# Altium PCB AFE_mezzanine.PcbDoc (part 2 of 2)
Units mm, origin at the board's own origin, x right, y up, seen from the top; angles counter-clockwise.
Board outline 100.05 x 34.55 mm, 4 copper layers (Component Side, Ground Plane, Power Plane, Solder Side), stack 1.013 mm thick; 133 components, 101 nets, 466 pads, 426 vias.
Unrouted connection lines stored in the file: 1.
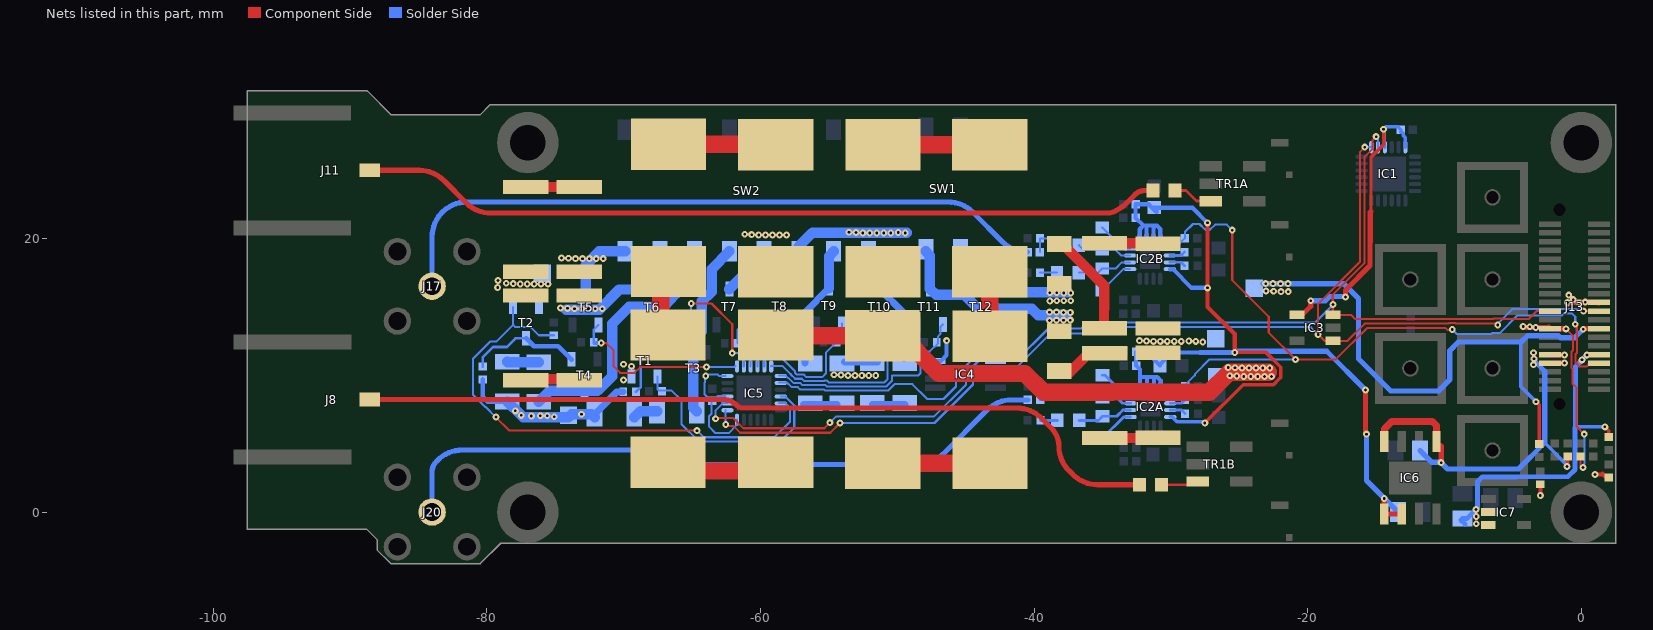
[diagram p4: the nets of this part, all layers, seen from the top]

## Via types
v1: diameter 0.5, hole 0.2, Component Side to Solder Side, tented both sides, 307 vias
v2: diameter 0.6, hole 0.3, Component Side to Solder Side, tented both sides, 114 vias
v3: diameter 0.5, hole 0.2, Component Side to Solder Side, 5 vias

## Nets (pads, with @x,y where several pads share a name; then routed paths per layer and width w, separated by ;. In a path a pad name is that pad's centre, name@x,y a point inside that pad or via, vN(x,y) a via of type N, cw(c..) or ccw(c..) an arc to the next point about the centre after c; other vN are vias at no path point) (continued)
N6V0A: C26.2 IC7.2 IC7.3 J13.31 R7.2 R36.1 R38.1 R46.2 R47.2 TP4.1 | length 36
  Component Side w0.254: v1(1.713,6.228) 2,5.941 R7.2@2,5.47
  Solder Side w0.254: -0.421,6.228 v1(1.713,6.228)
  Solder Side w0.356: R47.2@-80.304,9.695 -80.304,8.438 -79.946,8.08 R38.1@-78.501,8.08 ; C26.2@-8.819,-0.581 C26.2@-8.5,-0.9 ; C26.2@-8.701,-0.463 -8.357,-0.463 v1(-7.711,0.183) -7.584,0.31 -7.584,2.231 -7.244,2.57 -4.8,2.57 -4.79,2.58 -0.988,2.58 -0.468,3.1 -0.468,6.181 -0.421,6.228 -0.421,10.64 0.051,11.112 v1(0.051,11.125) ; v1@0.076,11.151 v1(0.406,11.481)
  Solder Side w0.508: R36.1@-72.127,7.142 -70.476,8.793 R46.2@-70.03,8.793
  Solder Side w0.762: R38.1@-78.501,8.08 v1(-77.487,7.066) -77.334,6.914 -74.03,6.914 -73.802,7.142 v1(-73.09,7.142) -72.356,7.142 R36.1@-72.127,6.914
  other v1: -7.685,-0.859 -7.685,-0.325 -75.072,6.965 -76.748,7.015 -76.088,7.041 -75.58,7.041 -77.916,7.396
N12V0A: J13.25 R8.2 R24.1 R26.1 TP2.1 | length 44.1
  Component Side w0.254: v1(-3.317,8.057) -3.088,7.828 R8.2@-3.088,4.971
  Component Side w0.381: v1(0.138,13.365) 0.185,13.413 J13.25@1.3,13.413
  Solder Side w0.254: -4.434,12.426 -4.434,9.174 v1(-3.317,8.057)
  Solder Side w0.381: v1@-23.281,16.693 v1(-23.078,16.693) v1(-22.544,16.693) v1(-21.986,16.693) v1(-21.452,16.693) -17.378,16.693 -16.296,15.61 -16.296,11.206 -13.934,8.844 -10.454,8.844 -9.616,9.682 -9.616,11.816 -9.006,12.426 -4.434,12.426 -4.409,12.426 -3.943,12.892 -1.674,12.892 -1.518,12.735 -0.492,12.735 v1(0.138,13.365)
  Solder Side w0.508: R26.1@-53.875,10.954 R24.1@-51.462,10.954
  other v1: -53.609,9.987 -53.101,9.987 -52.593,9.987 -52.085,9.987 -51.577,9.987 -54.117,10.013 -54.625,10.038 -21.96,16.109 -21.427,16.109 -22.494,16.134 -23.052,16.159
NetC5A_1: C5A.1 R10A.1 R13A.2 | length 2.4
  Solder Side w0.203: C5A.1@-39.55,8.2 -39.53,8.22 R13A.2@-39.53,9.2 -38.8,9.2 R10A.1@-38.3,8.7
NetC5B_1: C5B.1 R10B.1 R13B.2 | length 2.4
  Solder Side w0.152: C5B.1@-39.58,19 -39.56,19.02 R13B.2@-39.56,20 -38.83,20 R10B.1@-38.33,19.5
NetC13A_2: C13A.2 TR1A.1 | length 2.9
  Component Side w0.203: C13A.2@-29.7,23.5 -28.894,23.5 -28.124,22.73 TR1A.1@-27.09,22.73
NetC13B_2: C13B.2 TR1B.1 | length 2.8
  Component Side w0.203: C13B.2@-30.7,2 -28.27,2 TR1B.1@-28.04,2.23
NetIC2A_1: IC2A.1 R15A.2 | length 2.7
  Solder Side w0.203: R15A.2@-35,5.4 -33.45,6.95 IC2A.1@-32.95,6.95
NetIC2A_2: IC2A.2 R12A.2 R15A.1 | length 4.1
  Solder Side w0.203: R12A.2@-36.7,6.7 -35.3,6.7 R15A.1@-35,7 -33.964,7 -33.514,7.45 IC2A.2@-32.95,7.45
NetIC2A_3: IC2A.3 R9A.1 R10A.2 | length 4.1
  Solder Side w0.203: R10A.2@-36.7,8.7 -35.3,8.7 R9A.1@-35,8.4 -33.987,8.4 -33.537,7.95 IC2A.3@-32.95,7.95
NetIC2A_4: IC2A.4 R9A.2 | length 2.7
  Solder Side w0.203: R9A.2@-35,10 -34.825,10 -33.275,8.45 IC2A.4@-32.95,8.45
NetIC2A_10: IC2A.10 R11A.2 | length 1.2
  Solder Side w0.203: IC2A.10@-30.05,7.95 -29.22,7.95 R11A.2@-28.97,8.2
NetIC2A_11: IC2A.11 R14A.2 | length 1.2
  Solder Side w0.203: IC2A.11@-30.05,7.45 -29.22,7.45 R14A.2@-28.97,7.2
NetIC2B_1: IC2B.1 R15B.2 | length 2.7
  Solder Side w0.152: R15B.2@-35.03,16.2 -33.48,17.75 IC2B.1@-32.98,17.75
NetIC2B_2: IC2B.2 R12B.2 R15B.1 | length 4.1
  Solder Side w0.152: R12B.2@-36.73,17.5 -35.33,17.5 R15B.1@-35.03,17.8 -34.036,17.8 -33.586,18.25 IC2B.2@-32.98,18.25
NetIC2B_3: IC2B.3 R9B.1 R10B.2 | length 4.1
  Solder Side w0.152: R10B.2@-36.73,19.5 -36.43,19.2 R9B.1@-35.03,19.2 -34.094,19.2 -33.644,18.75 IC2B.3@-32.98,18.75
NetIC2B_4: IC2B.4 R9B.2 | length 2.7
  Solder Side w0.152: R9B.2@-35.03,20.8 -33.48,19.25 IC2B.4@-32.98,19.25
NetIC2B_10: IC2B.10 R11B.2 | length 1.2
  Solder Side w0.203: IC2B.10@-30.08,18.75 -29.25,18.75 R11B.2@-29,19
NetIC2B_11: IC2B.11 R14B.2 | length 1.2
  Solder Side w0.203: IC2B.11@-30.08,18.25 -29.25,18.25 R14B.2@-29,18
NetR12A_1: R12A.1 R16A.2 | length 1.2
  Solder Side w0.203: R16A.2@-39.53,6.7 R12A.1@-38.3,6.7
NetR12B_1: R12B.1 R16B.2 | length 1.2
  Solder Side w0.152: R16B.2@-39.56,17.5 R12B.1@-38.33,17.5
NetR18_2: R18.2 R19.1 | length 3.9
  Component Side w0.762: R19.1@-34.863,19.64 -30.977,19.64 R18.2@-30.952,19.615
NetR19_2: R19.2 R20.1 | length 7.7
  Component Side w0.762: R20.1@-38.165,19.591 -37.914,19.591 -34.863,16.54 -34.863,14.854 -34.893,14.824 -34.893,13.47 R19.2@-34.863,13.44
NetR20_2: R20.2 SW1.1 T12.3 | length 9.8
  Solder Side w0.762: SW1.1@-45.379,19.05 -43.855,17.526 T12.3@-43.855,16.291 -43.622,16.058 v1@-37.556,16.058
  other v1: -38.851,15.423 -38.343,15.448 -37.835,15.448 -37.327,15.448 -37.835,16.007 -37.327,16.007 -38.851,16.032 -38.343,16.032
NetR21_2: R21.2 R22.1 | length 3.9
  Component Side w0.762: R22.1@-34.838,5.413 -30.977,5.413 R21.2@-30.952,5.438
NetR22_2: R22.2 R23.1 | length 3.9
  Component Side w0.762: R23.1@-38.14,10.112 -37.507,10.112 -36.006,11.613 R22.2@-34.838,11.613
NetR23_2: R23.2 SW1.2 T11.3 | length 13.8
  Solder Side w0.762: SW1.2@-47.919,19.05 -47.614,18.745 T11.3@-47.614,16.316 -47.167,15.87 -45.089,15.87 -44.084,14.864 -40.172,14.864 -39.689,14.381 -37.632,14.381 ; v1@-38.242,14.407 -38.038,14.407
  other v1: -38.877,14 -38.369,14.026 -37.861,14.026 -37.353,14.026 -37.861,14.585 -37.353,14.585 -38.877,14.61 -38.369,14.61
NetR24_2: R24.2 R25.1 | length 2.4
  Solder Side w0.508: R24.2@-51.831,7.851 R25.1@-49.443,7.851
NetR25_2: R25.2 SW2.1 T10.3 | length 8.9
  Solder Side w0.508: T10.3@-51.297,16.316 -49.494,14.513 R25.2@-49.494,11.234
  Solder Side w0.762: SW2.1@-52.11,19.05 -51.297,18.237 T10.3@-51.297,16.316
NetR26_2: R26.2 R27.1 | length 2.4
  Solder Side w0.508: R27.1@-56.847,7.852 R26.2@-54.409,7.852
NetR27_2: R27.2 SW2.2 T9.3 | length 9
  Solder Side w0.508: R27.2@-56.758,10.904 -56.758,14.593 T9.3@-54.991,16.36
  Solder Side w0.762: T9.3@-54.991,16.36 -54.991,18.709 SW2.2@-54.65,19.05
NetR28_2: R28.2 R29.1 | length 7.9
  Component Side w1.27: R28.2@-51.069,3.574 -43.235,3.574 R29.1@-43.22,3.559
NetR29_2: R29.2 R30.1 | length 4.7
  Component Side w1.27: R30.1@-43.245,17.555 -43.245,12.885 R29.2@-43.22,12.859
NetR30_2: R30.2 R31.1 | length 7.8
  Component Side w1.27: R31.1@-51.043,26.855 R30.2@-43.245,26.855
NetR31_2: R31.2 SW2.3 T8.3 | length 11.9
  Solder Side w0.762: T8.3@-58.587,16.342 -57.19,17.739 SW2.3@-57.19,19.05 -57.19,19.411 -56.199,20.401 v1(-52.516,20.401) v1(-52.008,20.401) v1(-51.5,20.401) v1(-50.992,20.401) v1(-50.484,20.401) v1(-49.418,20.401) v1@-49.316,20.401
  other v1: -53.024,20.427 -49.926,20.427 -53.532,20.452
NetR32_2: R32.2 R33.1 | length 8.4
  Component Side w1.27: R33.1@-66.766,3.634 -66.129,2.997 -59.53,2.997 R32.2@-58.892,3.635
NetR33_2: R33.2 R34.1 | length 5.2
  Component Side w1.27: R33.2@-66.766,12.934 -66.715,12.984 -66.715,13.972 -67.299,14.556 -67.299,16.996 R34.1@-66.715,17.58
NetR34_2: R34.2 R35.1 | length 7.8
  Component Side w1.27: R34.2@-66.715,26.88 -58.917,26.88 R35.1@-58.892,26.855
NetR35_2: R35.2 SW2.4 T7.3 | length 3.8
  Solder Side w0.762: T7.3@-62.27,16.291 -59.885,18.676 ccw(c-60.259,19.05) SW2.4@-59.73,19.05
  other v1: -60.136,20.249 -59.628,20.249 -59.12,20.249 -58.612,20.249 -58.104,20.249 -60.644,20.274 -61.152,20.3
NetR36_2: R36.2 R37.1 | length 1.9
  Solder Side w0.762: R36.2@-69.227,6.914 -68.77,7.371 R37.1@-67.555,7.371
NetR37_2: R37.2 SW2.5 T3.3 | length 12.9
  Solder Side w0.762: R37.2@-64.655,7.371 -64.912,7.627 T3.3@-64.912,9.371 -64.912,12.578 -64.281,13.209 -64.281,15.393 -63.565,16.109 -63.565,17.755 SW2.5@-62.27,19.05
NetR38_2: R38.2 R39.1 | length 2.3
  Solder Side w0.762: R38.2@-78.501,10.98 -78.475,10.955 R39.1@-76.215,10.955
NetR39_2: R39.2 SW2.6 T4.3 | length 19.3
  Solder Side w0.762: R39.2@-76.215,8.055 -75.414,8.856 T4.3@-72.872,8.856 -71.912,8.856 -70.83,9.938 -70.83,13.772 -69.585,15.016 -67.071,15.016 -66.508,15.579 -66.508,15.62 -65.973,16.155 -65.932,16.155 -64.81,17.277 SW2.6@-64.81,19.05
NetR40_2: R40.2 R41.1 | length 4
  Component Side w0.762: R40.2@-77.104,9.708 -73.295,9.708 R41.1@-73.192,9.605
NetR41_2: R41.2 SW2.7 T6.3 | length 9.9
  Solder Side w0.762: v1@-74.211,14.786 -72.582,14.786 -71.797,14.786 -70.317,16.266 T6.3@-67.909,16.266 -67.35,16.824 SW2.7@-67.35,19.05
  other v1: -73.598,14.864 -73.09,14.864 -72.582,14.864 -72.074,14.864 -71.566,14.864 -74.106,14.889 -74.614,14.915
NetR42_2: R42.2 R43.1 | length 3.9
  Component Side w0.762: R42.2@-77.154,23.755 R43.1@-73.243,23.755
NetR43_2: R43.2 SW2.8 T5.3 | length 5.1
  Solder Side w0.762: T5.3@-72.786,16.286 -72.786,18.039 -71.775,19.05 SW2.8@-69.89,19.05
  other v1: -73.522,18.522 -73.014,18.522 -72.506,18.522 -71.998,18.522 -71.49,18.522 -74.03,18.547 -74.538,18.572
NetR46_1: R46.1 T1.3 T3.1 | length 6.5
  Solder Side w0.203: R46.1@-69.09,8.793 -68.747,9.136 -68.747,11.925 T1.3@-68.468,12.204
  Solder Side w0.508: T1.3@-68.468,12.204 -67.934,11.671 T3.1@-65.862,11.671
NetR47_1: R47.1 T2.3 T4.1 | length 8.4
  Solder Side w0.203: R47.1@-80.304,10.635 -80.304,11.308 -79.542,12.07 -78.526,12.07 -77.898,12.698 T2.3@-77.129,12.698
  Solder Side w0.356: T2.3@-77.129,12.698 -76.552,12.121 -74.787,12.121 T4.1@-73.822,11.156
P3V3: C10.2 C12.2 IC1.21 IC1.24 IC3.4 IC4.8 IC5.18 IC5.21 IC5.24 J13.19 R5.1 R6.1 R40.1 R42.1 T1.2 T2.2 TP5.1 | length 38.7
  Component Side w0.254: -15.378,21.967 -15.378,25.945 -14.463,26.859 v1(-14.463,27.974)
  Component Side w0.305: v1(-3,1.212) R6.1@-3,2.03 ; v1(1.001,2.748) 1.484,2.748 1.535,2.799 1.804,2.53 R5.1@2,2.53
  Component Side w0.381: IC3.4@-20.771,14.417 -20.401,14.417 -19.776,15.042 v1(-19.776,15.448) ; v3(-17.247,15.723) -17.247,16.206 -15.443,18.01 -15.443,19.739 -15.426,19.756 -15.426,21.918 -15.378,21.967 ; v1(-1.016,15.316) -1.016,15.166 -0.84,15.342 v1(0.279,15.342) 1.215,15.342 1.27,15.287 J13.19@1.3,15.318 ; v1@-0.688,15.644 -0.34,15.296 v1(-0.167,15.296)
  Solder Side w0.152: C12.2@-63.489,8.115 -63.137,8.467 IC5.21@-62.544,8.467 ; IC5.24@-62.544,9.967 -62.574,9.936 -63.016,9.936 -63.139,10.059 -63.874,10.059 v1(-63.997,9.936) -64.023,9.936 -64.048,9.911 -64.048,9.505 -64.079,9.474 -64.079,8.592 -63.607,8.121 C12.2@-63.54,8.121 -63.581,8.08 -63.581,7.194 -63.754,7.021 -63.754,6.239 -63.286,5.771 -62.33,5.771 -61.722,6.378 IC5.18@-61.722,6.755
  Solder Side w0.254: IC1.21@-14.362,26.669 -14.416,26.724 -14.416,27.273 -14.463,27.319 v1(-14.463,27.974) -14.289,28.148 -13.419,28.148 C10.2@-13.215,27.945 ; C10.2@-13.215,27.767 -13.096,27.767 -13.006,27.678 -13.006,27.519 -12.862,27.374 IC1.24@-12.862,26.669
  Solder Side w0.305: IC4.8@-47.223,11.038 -46.817,11.038 -46.395,11.46 v1(-46.395,12.527)
  Solder Side w0.381: v1(-19.776,15.448) -18.709,15.448 -18.396,15.762 -17.286,15.762 v3(-17.247,15.723)
  other v1: -70.004,9.647 -69.433,10.648 -70.017,10.8 -0.599,15.524 -0.929,15.855 -79.212,16.413 -77.561,16.667 -77.053,16.667 -76.545,16.667 -76.037,16.667 -75.529,16.667 -78.069,16.693 -78.577,16.718 -79.186,16.921
P5V0A: C1A.2 C1B.2 C2A.2 C2B.2 C3A.2 C3B.2 C25.2 IC2A.5 IC2A.6 IC2A.7 IC2A.8 IC2A.12 IC2B.5 IC2B.6 IC2B.7 IC2B.8 IC2B.12 IC6.1 IC6.2 | length 78.3
  Component Side w0.254: v1(-27.523,6.507) -24.729,9.301 -22.507,9.301 -22.117,9.692 -22.117,9.706 -21.986,9.837 -21.986,10.596 -23.053,11.664 v1(-25.338,11.664)
  Component Side w0.305: v1(-27.32,21.138) v1(-27.32,16.388) -27.32,14.991 -25.338,13.01 v1(-25.338,11.664)
  Component Side w0.381: v1(-15.788,8.92) -15.788,5.771 v1(-15.712,5.695) ; v1(-14.405,0.984) IC6.1@-14.405,-0.15 IC6.2@-13.135,-0.15
  Solder Side w0.254: IC2A.12@-30.05,6.95 -29.896,6.95 -29.556,6.611 -27.624,6.611 v1(-27.523,6.507) v1(-27.523,6.507)
  Solder Side w0.305: IC2B.5@-32.28,19.95 -32.28,20.669 -32.015,20.935 ; IC2A.5@-32.25,9.15 -32.273,9.173 -32.273,9.86 ; IC2B.6@-31.78,19.95 -31.78,20.894 -31.739,20.935 ; IC2A.6@-31.75,9.15 -31.75,9.846 -31.765,9.86 ; IC2B.7@-31.28,19.95 -31.28,20.755 -31.1,20.935 ; IC2A.7@-31.25,9.15 -31.25,9.841 -31.231,9.86 ; C2B.2@-31.231,22.243 -28.425,22.243 v1(-27.32,21.138) ; C2B.2@-31.041,21.951 -31.079,21.951 -31.628,22.5 C1B.2@-32.58,22.5 C3B.2@-32.58,21.5 -32.015,20.935 ; IC2B.8@-30.78,19.95 -30.78,20.687 -31.028,20.935 -31.1,20.935 ; IC2A.8@-30.75,9.15 -30.75,9.608 -31.003,9.86 -31.231,9.86 ; IC2B.12@-30.08,17.75 -29.85,17.75 -28.488,16.388 v1(-27.32,16.388) ; -27.853,11.664 -29.91,11.664 -30.8,10.774 C2A.2@-30.8,10.7 -31.8,11.7 C1A.2@-32.55,11.7 C3A.2@-32.55,10.7 -32.273,10.423 -32.273,9.86 ; -32.273,9.86 -31.765,9.86 ; -32.015,20.935 -31.739,20.935 ; -31.765,9.86 -31.231,9.86 ; -31.739,20.935 -31.1,20.935
  Solder Side w0.381: -27.853,11.664 v1(-25.338,11.664) -25.253,11.749 -18.616,11.749 v1(-15.788,8.92) ; v1(-15.712,5.695) -15.712,2.312 v1@-14.431,1.031 ; v1@-14.442,1.021 v1(-14.405,0.984) ; v1@-14.395,0.995 C25.2@-13.4,0
P6V0A: C11.2 IC6.5 IC6.8 J13.32 J13.34 R2.2 R28.1 R32.1 TP3.1 | length 68.3
  Component Side w0.254: v1(-1.056,3.332) -1.132,3.332 -1.005,3.459 R2.2@-1.005,4.056
  Component Side w0.381: IC6.5@-10.595,5.15 -10.251,4.806 v3(-10.251,3.612) ; J13.32@-2.3,11.508 -2.278,11.486 v1(-1.234,11.486) ; J13.34@-2.177,10.902 v1(-1.234,10.902)
  Component Side w0.508: IC6.8@-14.405,5.15 -14.405,6.087 -13.858,6.634 -11.8,6.634 ; -11.789,6.634 -10.911,6.634 -10.595,6.318 IC6.5@-10.595,5.15
  Component Side w1.27: R32.1@-58.892,12.935 -58.831,12.874 R28.1@-51.069,12.874 -49.709,12.874 -46.961,10.126 -40.676,10.126 -39.3,8.75 -34.305,8.75 -34.265,8.789 -31.538,8.789 -31.499,8.75 -27.185,8.75 -25.719,10.216 -22.9,10.216
  Solder Side w0.254: -2.682,5.059 -1.056,3.434 v1(-1.056,3.332)
  Solder Side w0.381: C11.2@-11.789,4.501 -10.921,3.633 -10.272,3.633 v3(-10.251,3.612) -9.794,3.155 -4.586,3.155 -2.682,5.059 -2.682,10.292 v1@-3.414,11.025
  other v1: -24.678,9.911 -24.17,9.911 -23.662,9.911 -23.154,9.911 -22.646,9.911 -25.186,9.936 -25.694,9.962 -24.805,10.521 -24.297,10.521 -23.789,10.521 -23.281,10.521 -22.773,10.521 -25.313,10.546 -25.821,10.571 -3.494,10.775 -3.469,11.206 -3.494,11.638
P12V0A: J13.26 R1.2 R18.1 R21.1 TP1.1 | length 14.9
  Component Side w0.152: v1(-1.132,13.391) -0.628,12.887 -0.628,11.808 -0.733,11.704 -0.733,10.547 -0.654,10.468 -0.654,9.381 -0.345,9.072 -0.345,6.254 v1(0.214,5.695) ; R1.2@-0.065,4.056 -0.065,3.434 v1(0.112,3.256)
  Component Side w0.381: v1(-4.256,13.569) -4.18,13.492 v1(-3.342,13.492) -2.404,13.492 -2.392,13.505 J13.26@-2.3,13.413 -2.278,13.391 v1(-1.132,13.391)
  Solder Side w0.152: v1(0.112,3.256) 0.112,3.409 0.214,3.51 v1(0.214,5.695)
  other v1: -27.675,12.426 -31.282,12.476 -30.774,12.476 -30.266,12.476 -29.758,12.476 -29.25,12.476 -28.183,12.476 -31.79,12.502 -28.691,12.502 -32.298,12.527 -3.774,13.543
RF1_IN: C5B.2 J17.1 | length 49.9
  Solder Side w0.381: J17.1@-84,16.5 -84,20.122 cw(c-81.46,20.122) -81.46,22.662 -46.279,22.662 cw(c-46.279,20.122) -44.483,21.918 -42.309,19.744 ccw(c-40.513,21.54) -40.513,19 C5B.2@-40.48,19
RF1_OUT: C13B.1 J8.1 | length 59.4
  Component Side w0.381: J8.1@-88.55,8.224 -62.755,8.224 cw(c-62.755,6.785) -61.737,7.803 ccw(c-61.246,8.293) -61.246,7.6 -41.25,7.6 cw(c-41.25,5.06) -39.453,6.856 -38.748,6.15 cw(c-40.092,4.806) -38.191,4.806 ccw(c-35.677,4.806) -37.454,3.028 -37.171,2.744 ccw(c-35.374,4.54) -35.374,2 C13B.1@-32.3,2
RF2_IN: C5A.2 J20.1 | length 49.3
  Solder Side w0.381: J20.1@-84,0 -84,2.946 cw(c-82.932,2.946) -83.687,3.701 -83.606,3.782 cw(c-81.81,1.986) -81.81,4.526 -68.322,4.526 cw(c-68.322,2.126) -66.624,3.823 ccw(c-65.808,4.64) -65.808,3.485 -48.463,3.485 ccw(c-48.463,6.025) -46.667,4.229 -43.44,7.456 cw(c-41.644,5.66) -43.423,7.473 cw(c-41.644,5.66) -41.644,8.2 C5A.2@-40.45,8.2
RF2_OUT: C13A.1 J11.1 | length 58.9
  Component Side w0.381: J11.1@-88.575,24.975 -84.939,24.975 cw(c-84.939,22.435) -83.143,24.231 -81.505,22.593 ccw(c-79.709,24.389) -79.709,21.849 -34.617,21.849 ccw(c-34.617,22.898) -34.082,21.996 -33.73,22.205 ccw(c-35.027,24.389) -33.23,22.593 -32.603,23.221 cw(c-31.928,22.546) -31.928,23.5 C13A.1@-31.3,23.5
SCL: IC1.19 IC3.1 IC4.2 IC5.19 J13.21 | length 85.8
  Component Side w0.152: v1(-62.544,6.4) -62.444,6.3 -61.996,6.3 -61.492,5.796 -54.904,5.796 v1(-54.193,6.507) ; v1(-15.833,26.669) -16.171,26.331 -16.171,19.584 -16.167,19.579 -16.167,18.31 -19.242,15.234 v1(-19.242,12.984) -18.775,12.517 IC3.1@-18.171,12.517 -17.094,12.517 -15.839,13.772 -9.683,13.772 -9.636,13.819 -9.24,13.819 -9.193,13.772 v1@-6.111,13.772 ; v1(0.146,14.683) J13.21@1.3,14.683
  Solder Side w0.152: v1(-62.544,6.4) IC5.19@-62.544,7.467 ; v1(-54.193,6.507) -47.284,6.507 -44.465,9.327 -44.465,9.835 -43.911,10.388 IC4.2@-42.823,10.388 -41.458,10.388 -38.811,13.035 -36.413,13.035 -35.93,13.518 -19.776,13.518 v1(-19.242,12.984) ; v1(-15.833,26.669) IC1.19@-15.362,26.669 ; v1(-6.111,13.67) -6.111,13.772 -5.051,14.831 -0.379,14.831 -0.365,14.817 0.011,14.817 v1(0.146,14.683)
SDA: IC1.20 IC3.3 IC4.1 IC5.20 J13.22 | length 82.8
  Component Side w0.152: v1(-63.276,6.822) -63.22,6.879 -62.006,6.879 -61.254,6.126 -55.336,6.126 v1(-54.929,6.533) ; v1(-15.001,27.437) -15.259,27.179 -15.259,26.567 -15.846,25.98 -15.846,20.282 -15.867,20.261 -15.867,19.71 -15.862,19.706 -15.862,18.183 -18.171,15.875 IC3.3@-18.171,14.417 -16.84,14.417 -16.525,14.102 -9.784,14.102 -9.762,14.123 -9.114,14.123 -9.092,14.102 -6.457,14.102 -6.41,14.149 -5.811,14.149 -5.764,14.102 -3.866,14.102 -3.286,14.683 J13.22@-2.3,14.683
  Solder Side w0.152: v1(-63.276,6.822) -63.276,7.437 -62.758,7.955 IC5.20@-62.422,7.955 ; v1(-54.929,6.533) -54.472,6.99 -47.309,6.99 -44.973,9.327 -44.973,10.131 -44.066,11.038 IC4.1@-42.823,11.038 -41.331,11.038 -38.953,13.416 -36.54,13.416 -36.108,13.848 -19.471,13.848 v1(-18.15,15.169) ; v1(-15.001,27.437) -14.862,27.298 IC1.20@-14.862,26.669
SW1: IC5.1 R48.1 T5.1 | length 13.6
  Component Side w0.152: v1(-71.643,12.349) -71.262,12.349 -70.728,11.816 -70.728,10.648 -70.25,10.169 -69.226,10.169 -68.798,10.597 v1(-63.946,10.597)
  Solder Side w0.152: R48.1@-72.189,12.4 R48.1@-72.138,12.349 ; R48.1@-72.189,12.4 -72.188,13.334 T5.1@-71.836,13.686 ; v1(-63.946,10.597) -61.914,10.597 IC5.1@-61.844,10.667
  Solder Side w0.305: R48.1@-72.138,12.349 v1(-71.643,12.349)
SW2: IC5.2 R49.1 T6.1 | length 10.6
  Component Side w0.152: v1(-65.064,15.245) -63.578,15.245 -62.067,13.734 v1(-62.067,11.613)
  Solder Side w0.152: T6.1@-66.959,13.666 -65.834,13.666 R49.1@-65.699,13.53 -65.636,13.53 -65.064,14.102 v1(-65.064,15.245) ; v1(-62.067,11.613) -61.66,11.613 -61.222,11.175 IC5.2@-61.222,10.655
SW3: IC5.3 R50.1 T7.1 | length 3.6
  Solder Side w0.152: T7.1@-61.32,13.691 -61.673,13.338 R50.1@-61.673,12.349 -60.722,11.399 IC5.3@-60.722,10.655
SW4: IC5.4 R51.1 T8.1 | length 4.9
  Solder Side w0.152: IC5.4@-60.222,10.655 -60.222,11.221 -59.78,11.664 -58.727,11.664 -58.13,12.261 -57.914,12.261 R51.1@-57.914,12.476 -57.914,13.465 T8.1@-57.637,13.742
SW5: IC5.5 R52.1 T9.1 | length 9.9
  Solder Side w0.152: IC5.5@-59.722,10.655 -59.722,11.011 -59.374,11.359 -58.536,11.359 -57.48,10.303 -57.48,10.183 -57.346,10.049 -56.85,10.049 -56.686,9.886 -55.463,9.886 -55.223,10.125 -55.223,11.632 -54.041,12.814 T9.1@-54.041,13.76
SW6: IC5.6 R53.1 T10.1 | length 13.4
  Solder Side w0.152: IC5.6@-59.222,10.655 -59.21,10.667 -58.378,10.667 -57.785,10.074 -57.785,10.057 -57.473,9.745 -56.976,9.745 -56.812,9.581 -55.337,9.581 -55.304,9.613 -55.145,9.613 -55.011,9.479 -50.936,9.479 -50.802,9.613 -50.802,9.619 -50.702,9.719 -50.702,12.4 R53.1@-50.751,12.4 -50.347,12.804 T10.1@-50.347,13.716
SW7: IC5.7 R54.1 T11.1 | length 15.8
  Solder Side w0.152: IC5.7@-58.644,9.967 -58.161,9.967 -58.145,9.983 -58.141,9.983 -58.141,9.956 -57.994,9.809 -57.969,9.809 -57.599,9.44 -57.102,9.44 -56.938,9.276 -55.239,9.276 -55.138,9.174 -50.81,9.174 -50.497,9.487 -50.497,9.493 -50.397,9.593 -50.397,9.983 -48.456,9.983 -48.314,10.125 -48.314,11.395 -47.995,11.714 -47.652,11.714 -47.017,12.349 -47.017,12.845 -46.852,13.01 -46.852,13.528 T11.1@-46.664,13.716
SW8: IC5.8 R55.1 T12.1 | length 19.3
  Solder Side w0.152: IC5.8@-58.644,9.467 IC5.8@-58.522,9.467 ; IC5.8@-58.522,9.455 -58.08,9.455 -58.003,9.378 -57.969,9.378 -57.725,9.135 -57.274,9.135 -57.11,8.971 -55.365,8.971 -55.264,8.87 -50.683,8.87 -50.201,9.352 -48.91,9.352 -47.817,8.26 -46.624,8.26 -45.709,9.174 -45.709,9.949 R55.1@-43.334,12.324 -43.334,12.972 T12.1@-43.144,13.162
SW9: IC5.10 R44.1 T1.1 | length 16.8
  Solder Side w0.152: T1.1@-67.518,9.904 -67.518,8.974 -67.439,8.895 -66.512,8.895 -65.775,8.158 -65.775,6.415 -64.522,5.161 -58.536,5.161 -57.531,6.166 -57.531,7.792 -58.181,8.442 IC5.10@-58.517,8.442
SW10: IC5.11 R45.1 T2.1 | length 38.1
  Component Side w0.152: v1(-79.339,6.939) -78.348,5.949 v1(-64.632,5.949)
  Solder Side w0.152: v1(-79.339,6.939) -80.073,7.674 -80.115,7.674 -81.015,8.574 -81.015,11.206 -79.771,12.451 -79.313,12.451 -78.079,13.685 ; T2.1@-78.079,14.998 -78.079,13.685 ; R45.1@-75.097,12.921 -76.202,12.921 -76.799,13.518 -77.911,13.518 -78.079,13.685 ; v1(-64.632,5.949) -64.15,5.466 -58.993,5.466 -57.838,6.621 -57.838,7.599 -58.018,7.779 -58.018,7.793 -58.193,7.967 IC5.11@-58.644,7.967
VCM: C6A.2 C6B.2 IC2A.9 IC2B.9 J13.33 | length 55.5
  Component Side w0.152: v1(-25.516,20.604) -25.516,16.947 -22.849,14.28 -22.849,13.111 v1(-20.893,11.156) -17.947,11.156 -15.636,13.467 -9.944,13.467 -9.791,13.315 -9.463,13.315 v1(-9.438,13.34) ; v1(-0.446,13.721) -0.341,13.615 -0.341,13.167 -0.319,13.146 -0.319,11.651 -0.428,11.543 -0.428,10.927 -0.147,10.647 0.386,10.647 0.405,10.666 0.427,10.666 0.54,10.78 0.54,10.873 J13.33@1.3,10.873
  Solder Side w0.152: IC2B.9@-30.08,19.25 -29.73,19.25 C6B.2@-28.98,20 -28.98,20.468 -28.39,21.058 -27.916,21.058 -27.518,20.659 -27.121,20.659 -26.77,21.011 -25.923,21.011 v1(-25.516,20.604) ; IC2A.9@-30.05,8.45 -29.804,8.45 -28.255,9.999 -28.255,10.084 -27.184,11.156 v1(-20.893,11.156) ; v1(-9.438,13.34) -9.108,13.01 -6.59,13.01 -6.5,13.1 -5.944,13.1 -4.666,14.378 -1.406,14.378 -1.258,14.526 -0.693,14.526 -0.446,14.28 v1(-0.446,13.721)
pads on no net: IC1.22 IC1.25 IC3.5 IC4.3 IC5.12 IC5.13 IC5.14 IC5.15 IC5.16 IC5.17 IC5.22 IC5.25 IC6.4 IC6.7 IC7.4 J13.20 J13.27 J13.28 J13.P1 J13.P2 TR1A.2 TR1B.2

## Polygon pours and split planes (outlines as drawn)
GND on Component Side "gnd" (solid, remove dead copper, pour order 2): -97.015,30.265 -88.937,30.265 -87.273,28.601 -87.249,28.625 -80.472,28.625 -79.472,29.625 2.028,29.625 2.028,-2.011 -79.108,-2.011 -80.472,-3.375 -86.972,-3.375 -87.543,-2.804 -87.543,-1.826 -88.604,-0.765 -97.015,-0.765 -97.015,4.164 -96.976,4.125 -89.663,4.125 -88.828,4.96 -88.828,5.724 -89.389,6.286 -89.389,10.299 -88.828,10.86 -88.828,11.673 -89.44,12.285 -97.015,12.285 -96.972,21.125 -96.772,21.125 -89.439,21.125 -88.853,21.71 -88.853,22.454 -89.472,23.073 -89.472,27.125 -88.972,27.625 -88.972,28.125 -89.472,28.625 -96.972,28.625 -96.972,30.125
GND on Solder Side "gnd" (solid, remove dead copper, pour order 0): -97.015,30.265 -88.937,30.265 -87.273,28.601 -87.249,28.625 -80.472,28.625 -79.472,29.625 2.028,29.625 2.028,-1.875 -78.972,-1.875 -80.472,-3.375 -86.972,-3.375 -87.543,-2.804 -87.543,-1.826 -88.604,-0.765 -97.015,-0.765 -97.015,4.164 -96.976,4.125 -89.663,4.125 -88.828,4.96 -88.828,5.724 -89.389,6.286 -89.389,10.299 -88.828,10.86 -88.828,11.673 -89.44,12.285 -97.015,12.285 -96.972,21.125 -96.772,21.125 -89.439,21.125 -88.853,21.71 -88.853,22.454 -89.472,23.073 -89.472,27.125 -88.972,27.625 -88.972,28.125 -89.472,28.625 -96.972,28.625 -96.972,30.125
GND on Ground Plane (split plane): 217 vertices, not listed, extent -97.015,-3.265 2.015,30.265
P12V0A on Power Plane (split plane): -0.562,13.745 -0.562,13.24 -1.234,12.568 -1.615,12.949 -1.636,12.963 -1.661,12.968 -4.088,12.968 -5.06,13.94 -5.081,13.954 -5.105,13.959 -24.835,13.959 -24.86,13.954 -24.881,13.94 -27.238,11.582 -27.252,11.561 -27.257,11.537 -27.257,10.282 -27.258,10.281 -27.283,10.265 -27.294,10.249 -30.701,10.249 -30.709,10.25 -30.733,10.25 -30.737,10.255 -30.74,10.265 -30.756,10.29 -30.781,10.307 -30.792,10.309 -30.811,10.321 -30.836,10.326 -31.647,10.326 -32.441,11.12 -32.462,11.134 -32.487,11.139 -32.663,11.139 -33.224,11.7 -33.224,13.821 -31.87,15.175 -1.992,15.175
P6V0A on Power Plane (split plane): -4.161,12.857 -4.14,12.843 -4.115,12.838 -1.687,12.838 -0.587,11.738 -0.587,9.563 -1.158,8.992 -3.118,8.992 -4.115,9.988 -4.115,10.947 -4.12,10.977 -4.129,10.989 -4.137,11.001 -5.712,12.576 -5.737,12.593 -5.766,12.599 -8.712,12.599 -8.741,12.593 -8.754,12.585 -8.766,12.576 -11.614,9.728 -21.971,9.728 -22,9.723 -22.025,9.706 -22.307,9.424 -26.334,9.424 -27.097,10.187 -27.101,10.209 -27.115,10.23 -27.128,10.238 -27.128,11.51 -24.809,13.829 -5.132,13.829
N12V0A on Power Plane (split plane): -20.588,16.575 -20.588,15.305 -31.897,15.305 -31.921,15.3 -31.942,15.286 -33.334,13.894 -33.348,13.873 -33.353,13.848 -33.353,11.723 -44.552,11.723 -44.576,11.718 -44.597,11.704 -46.351,9.95 -48.626,9.95 -48.61,9.967 -48.596,9.988 -48.591,10.013 -48.596,10.037 -48.61,10.058 -48.631,10.072 -48.656,10.077 -48.68,10.072 -48.701,10.058 -49.546,9.214 -57.798,9.214 -58.852,10.268 -58.852,11.196 -58.849,11.198 -58.033,12.014 -46.025,12.014 -45.996,12.02 -45.971,12.036 -45.206,12.801 -44.221,12.801 -44.192,12.807 -44.167,12.824 -43.619,13.372 -36.551,13.372 -36.526,13.377 -36.505,13.391 -32.866,17.029 -21.042,17.029
N6V0A on Power Plane (split plane): 0.926,11.876 0.926,5.742 -4.108,0.708 -4.119,0.706 -4.127,0.7 -30.233,0.7 -32.639,3.105 -32.639,9.22 -32.645,9.249 -32.661,9.274 -33.347,9.96 -33.372,9.977 -33.401,9.982 -40.183,9.982 -40.212,9.977 -40.221,9.971 -44.393,9.971 -44.418,9.966 -44.439,9.952 -47.92,6.471 -78.398,6.471 -78.791,6.864 -78.791,8.589 -78.22,9.16 -59.998,9.16 -59.973,9.165 -59.952,9.179 -58.95,10.182 -57.871,9.103 -57.85,9.089 -57.825,9.084 -49.519,9.084 -49.494,9.089 -49.473,9.103 -48.756,9.821 -46.325,9.821 -46.3,9.826 -46.279,9.84 -44.525,11.594 -33.301,11.594 -32.736,11.029 -32.715,11.015 -32.69,11.01 -32.513,11.01 -31.72,10.216 -31.699,10.202 -31.674,10.197 -31.611,10.197 -31.601,10.182 -31.576,10.166 -31.547,10.16 -30.887,10.16 -30.887,9.398 -30.881,9.369 -30.864,9.344 -30.404,8.884 -30.404,3.048 -30.398,3.019 -30.382,2.994 -30.153,2.765 -30.141,2.757 -30.128,2.749 -30.099,2.743 -23.8,2.743 -23.771,2.749 -23.762,2.755 -5.258,2.755 -5.233,2.76 -5.212,2.774 -1.086,6.899 -1.072,6.92 -1.067,6.945 -1.067,8.859 -1.064,8.861 -0.454,9.471 -0.446,9.483 -0.437,9.496 -0.432,9.525 -0.432,11.754 -0.429,11.757 -0.412,11.782 -0.411,11.785 -0.14,12.056 0.746,12.056
GND on Power Plane (split plane): -4.267,10.916 -4.267,9.957 -4.262,9.928 -4.245,9.903 -3.204,8.861 -3.179,8.845 -3.15,8.839 -1.197,8.839 -1.197,6.972 -5.285,2.884 -23.762,2.884 -23.771,2.89 -23.8,2.896 -30.067,2.896 -30.251,3.08 -30.251,8.915 -30.257,8.945 -30.274,8.969 -30.734,9.43 -30.734,10.121 -30.714,10.121 -30.707,10.119 -27.245,10.119 -26.419,9.293 -26.394,9.277 -26.365,9.271 -22.276,9.271 -22.247,9.277 -22.222,9.293 -21.939,9.576 -11.582,9.576 -11.553,9.581 -11.528,9.598 -8.681,12.446 -5.797,12.446
GND on Power Plane (split plane): -87.423,28.737 -89.259,26.902 -89.275,26.877 -89.281,26.848 -89.281,22.941 -89.302,22.958 -89.377,22.998 -89.39,23.005 -89.415,23.015 -89.415,26.934 -89.39,26.945 -89.302,26.992 -89.224,27.055 -89.055,27.224 -88.992,27.301 -88.951,27.378 -88.945,27.39 -88.853,27.61 -88.824,27.706 -88.815,27.806 -88.815,28.044 -88.824,28.144 -88.853,28.24 -88.945,28.46 -88.951,28.472 -88.992,28.548 -89.055,28.626 -89.224,28.795 -89.28,28.84 -89.302,28.858 -89.377,28.898 -89.39,28.905 -89.61,28.997 -89.648,29.008 -89.706,29.026 -89.806,29.035 -97.015,29.035 -97.015,30.265 -88.951,30.265
GND on Power Plane (split plane): -2.058,22.955 -2.058,15.305 -20.458,15.305 -20.458,16.602 -20.463,16.627 -20.477,16.648 -20.97,17.14 -20.991,17.154 -21.015,17.159 -32.893,17.159 -32.918,17.154 -32.939,17.14 -36.577,13.501 -43.561,13.501 -43.561,14.427 -43.567,14.456 -43.583,14.481 -44.701,15.599 -44.726,15.615 -44.755,15.621 -70.479,15.621 -73.53,18.672 -73.555,18.689 -73.584,18.695 -79.146,18.695 -79.176,18.689 -79.188,18.681 -79.2,18.672 -79.835,18.037 -79.852,18.012 -79.858,17.983 -79.858,13.9 -81.362,12.395 -85.008,12.395 -86.893,14.281 -86.893,22.27 -84.398,24.765 -3.867,24.765
GND on Power Plane (split plane): -89.281,12.141 -89.275,12.112 -89.268,12.1 -89.276,12.108 -89.352,12.148 -89.365,12.155 -89.585,12.246 -89.623,12.258 -89.681,12.275 -89.781,12.285 -97.015,12.285 -97.015,20.914 -89.806,20.914 -89.706,20.924 -89.61,20.953 -89.39,21.045 -89.302,21.092 -89.281,21.109
P3V3 on Power Plane (split plane): 2.015,-1.765 -3.632,-1.765 -3.632,0.254 -3.638,0.283 -3.654,0.308 -3.99,0.643 1.036,5.669 1.05,5.69 1.055,5.715 1.055,11.903 1.05,11.928 1.036,11.949 0.819,12.167 0.798,12.181 0.773,12.186 -0.167,12.186 -0.192,12.181 -0.213,12.167 -0.494,11.885 -0.512,11.882 -0.533,11.867 -1.142,12.476 -0.451,13.167 -0.437,13.188 -0.432,13.213 -0.432,13.772 -0.437,13.797 -0.451,13.818 -1.905,15.271 -1.905,22.987 -1.911,23.016 -1.917,23.026 -1.927,23.041 -3.781,24.895 -3.806,24.912 -3.835,24.918 -84.43,24.918 -84.459,24.912 -84.484,24.895 -87.024,22.355 -87.04,22.33 -87.046,22.301 -87.046,14.249 -87.04,14.22 -87.024,14.195 -85.093,12.265 -85.081,12.257 -85.068,12.248 -85.039,12.243 -81.331,12.243 -81.302,12.248 -81.277,12.265 -79.727,13.814 -79.719,13.827 -79.711,13.839 -79.705,13.868 -79.705,17.952 -79.115,18.542 -73.615,18.542 -70.564,15.491 -70.552,15.482 -70.54,15.474 -70.51,15.468 -44.786,15.468 -43.714,14.396 -43.714,13.494 -44.253,12.954 -45.237,12.954 -45.267,12.948 -45.279,12.94 -45.291,12.932 -46.056,12.167 -58.064,12.167 -58.094,12.161 -58.118,12.144 -58.954,11.309 -58.963,11.303 -58.977,11.282 -58.982,11.257 -58.982,10.306 -59.007,10.301 -59.028,10.287 -60.025,9.29 -78.146,9.29 -78.153,9.3 -78.177,9.316 -78.207,9.322 -86.278,9.322 -89.128,12.173 -89.128,21.251 -89.055,21.324 -88.992,21.401 -88.951,21.478 -88.945,21.49 -88.853,21.71 -88.824,21.806 -88.815,21.906 -88.815,22.144 -88.824,22.244 -88.853,22.34 -88.945,22.56 -88.951,22.572 -88.992,22.648 -89.055,22.726 -89.128,22.799 -89.128,26.816 -87.312,28.633 -87.273,28.601 -87.185,28.554 -87.089,28.525 -86.989,28.515 -80.511,28.515 -80.411,28.525 -80.315,28.554 -80.227,28.601 -80.15,28.664 -79.549,29.265 2.015,29.265
GND on Power Plane (split plane): -86.363,9.192 -86.338,9.175 -86.309,9.169 -78.394,9.169 -78.902,8.661 -78.916,8.64 -78.921,8.616 -78.921,6.838 -78.916,6.813 -78.902,6.792 -78.47,6.36 -78.449,6.346 -78.424,6.341 -47.894,6.341 -47.869,6.346 -47.848,6.36 -44.367,9.841 -40.221,9.841 -40.212,9.835 -40.183,9.83 -33.433,9.83 -32.792,9.189 -32.792,3.073 -32.786,3.044 -32.769,3.019 -30.331,0.581 -30.306,0.564 -30.277,0.559 -30.248,0.564 -30.239,0.57 -4.133,0.57 -3.785,0.222 -3.785,-1.765 -78.989,-1.765 -79.089,-1.775 -79.185,-1.804 -79.273,-1.851 -79.35,-1.914 -80.701,-3.265 -86.799,-3.265 -87.515,-2.549 -87.515,-2.011 -87.525,-1.911 -87.554,-1.815 -87.601,-1.727 -87.664,-1.65 -88.4,-0.914 -88.477,-0.851 -88.565,-0.804 -88.661,-0.775 -88.761,-0.765 -97.015,-0.765 -97.015,4.164 -89.781,4.164 -89.681,4.174 -89.585,4.203 -89.365,4.294 -89.276,4.341 -89.199,4.405 -89.03,4.574 -88.967,4.651 -88.926,4.728 -88.92,4.739 -88.828,4.96 -88.799,5.056 -88.789,5.155 -88.789,5.394 -88.799,5.493 -88.828,5.589 -88.92,5.81 -88.926,5.821 -88.967,5.898 -89.03,5.975 -89.199,6.144 -89.255,6.19 -89.276,6.208 -89.352,6.248 -89.365,6.255 -89.389,6.265 -89.389,10.184 -89.365,10.194 -89.276,10.241 -89.199,10.305 -89.03,10.474 -88.967,10.551 -88.926,10.628 -88.92,10.639 -88.828,10.86 -88.799,10.956 -88.789,11.055 -88.789,11.294 -88.799,11.393 -88.828,11.489 -88.92,11.71 -88.926,11.721 -88.964,11.792

## Keep-outs
Keep-Out Layer:
  lines w0.05: -97.5,30.75 -88.75,30.75 -88.25,30.25 -87,29 -80.5,29 -79.75,29.75 -69.5,29.75 2.5,29.75 2.5,-2.25 -79,-2.25 -80,-3.25 -80.5,-3.75 -87,-3.75 -88,-2.75 -88,-2.25 -88,-2 -88.75,-1.25 -97.5,-1.25 -97.5,30.75 ; -97.5,30.75 -96.5,30.75 -97.5,30.75

## Other copper
Component Side:
  rectangle net N6V0A: 0.025,11.278 0.279,11.481
  rectangle net N6V0A: 0.152,11.125 0.305,11.481
  rectangle net N6V0A: -7.939,-1.265 -7.279,0.411
  rectangle net P3V3: -79.491,16.185 -75.249,17.15
  rectangle net P12V0A: -32.552,11.918 -27.193,12.984
  rectangle net NetR31_2: -53.761,19.309 -49.138,20.731
  rectangle net NetR35_2: -61.457,19.233 -57.74,20.604
  rectangle net NetR20_2: -39.08,15.169 -37.073,16.312
  rectangle net NetR23_2: -39.131,13.721 -37.099,14.864
  rectangle net NetR43_2: -74.893,17.963 -71.185,18.877
  rectangle net NetR41_2: -74.894,14.586 -71.286,16.21
  rectangle net P6V0A: -3.723,10.622 -2.986,11.708
  rectangle net P3V3: -1.081,15.25 -0.5,15.931
  rectangle net GND: -21.503,3.358 -21.249,4.171
  rectangle net GND: -13.708,18.652 -11.394,19.267
  rectangle net GND: -14.707,15.892 -14.155,18.085
  rectangle net GND: -13.769,14.834 -11.278,15.451
  rectangle net GND: -10.954,15.9 -10.262,18.266
  rectangle net GND: -10.954,9.444 -10.262,11.81
  rectangle net GND: -13.769,8.377 -11.278,8.995
  rectangle net GND: -14.707,9.435 -14.155,11.628
  rectangle net GND: -13.708,12.196 -11.394,12.811
  rectangle net GND: -4.954,9.403 -4.262,11.769
  rectangle net GND: -7.769,8.336 -5.278,8.954
  rectangle net GND: -8.707,9.394 -8.155,11.587
  rectangle net GND: -7.708,12.155 -5.394,12.77
  rectangle net GND: -4.954,15.903 -4.262,18.269
  rectangle net GND: -7.769,14.836 -5.278,15.454
  rectangle net GND: -8.707,15.894 -8.155,18.087
  rectangle net GND: -7.708,18.655 -5.394,19.27
  rectangle net GND: -4.954,3.403 -4.262,5.769
  rectangle net GND: -7.769,2.336 -5.278,2.954
  rectangle net GND: -8.707,3.394 -8.155,5.587
  rectangle net GND: -7.708,6.155 -5.394,6.77
  rectangle net GND: -4.954,21.903 -4.262,24.269
  rectangle net GND: -7.769,20.836 -5.278,21.454
  rectangle net GND: -8.707,21.894 -8.155,24.087
  rectangle net GND: -7.708,24.655 -5.394,25.27
  rectangle net GND: -17.453,19.903 -16.761,22.269
  rectangle net GND: -20.268,18.836 -17.777,19.454
  rectangle net GND: -20.672,19.898 -20.121,22.091
  rectangle net GND: -20.208,22.655 -17.893,23.27
  rectangle net GND: -17.454,25.903 -16.762,28.269
  rectangle net GND: -20.269,24.836 -17.778,25.454
  rectangle net GND: -20.672,25.898 -20.121,28.091
  rectangle net GND: -20.208,28.655 -17.894,29.27
  rectangle net GND: -17.453,5.403 -16.761,7.769
  rectangle net GND: -20.268,4.336 -17.777,4.954
  rectangle net GND: -20.732,5.307 -20.18,7.5
  rectangle net GND: -20.208,8.155 -17.893,8.77
  rectangle net GND: -17.453,-0.597 -16.761,1.769
  rectangle net GND: -20.268,-1.664 -17.777,-1.046
  rectangle net GND: -20.732,-0.693 -20.18,1.5
  rectangle net GND: -20.208,2.155 -17.893,2.77
Solder Side:
  rectangle net N6V0A: -7.99,-1.087 -7.457,0.502
  rectangle net P12V0A: -28.869,12.146 -26.913,13.01
  rectangle net P6V0A: -26.253,9.682 -24.729,10.724
  rectangle net P3V3: -76.545,15.321 -75.503,16.896
  rectangle net P3V3: -70.296,9.378 -69.153,11.181
  rectangle net N12V0A: -23.484,15.804 -21.147,17.023
  rectangle net GND: -48.275,14.432 -45.379,15.194
  rectangle net GND: -48.275,13.137 -47.182,15.194
  region net GND: -72.417,14.244 -74.614,14.244 -74.614,13.126 -72.417,13.126
  rectangle net GND: -73.217,10.622 -72.125,11.74
  rectangle net GND: -70.169,11.435 -69.128,13.391
  rectangle net GND: -69.687,13.137 -69.052,14.051
  rectangle net GND: -63.845,11.079 -62.524,12.471
  rectangle net N12V0A: -54.917,9.708 -51.031,11.003
  rectangle net NetR35_2: -60.314,19.309 -59.18,20.427
  rectangle net NetR35_2: -61.457,19.969 -57.85,20.604
  rectangle net NetR20_2: -39.08,15.169 -37.073,16.312
  rectangle net NetR23_2: -39.131,13.721 -37.099,14.864
  rectangle net NetR43_2: -74.893,17.861 -69.331,18.877
  rectangle net NetR41_2: -74.868,14.407 -71.719,15.321
  rectangle net GND: -10.124,0.462 -9.387,1.91
Power Plane (plane layer: these items are gaps in the copper):
  lines w0.127: -58.982,10.241 -59.998,9.225 -78.247,9.225 -78.856,8.616 -78.856,6.838 -78.424,6.406 -47.894,6.406 -44.393,9.906 -39.573,9.906 ; -58.917,11.257 -58.917,10.241 -57.825,9.149 -49.519,9.149 -48.656,10.013 ; -48.783,9.886 -46.325,9.886 -44.552,11.659 -33.274,11.659 -32.69,11.074 -32.487,11.074 -31.674,10.262 -30.836,10.262 -30.759,10.185 -30.709,10.185 -30.707,10.184 -27.161,10.184 ; -43.637,13.437 -36.551,13.437 -32.893,17.094 -21.015,17.094 -20.523,16.602 -20.523,15.24 ; -33.289,11.659 -33.289,13.848 -31.897,15.24 -1.965,15.24 -0.497,13.772 -0.497,13.213 -1.234,12.476 ; -30.277,0.635 -4.089,0.635 0.991,5.715 0.991,11.903 0.773,12.121 -0.167,12.121 -0.523,11.765 ; -27.193,10.19 -27.193,11.537 -24.835,13.894 -5.105,13.894 -4.115,12.903 -1.661,12.903 -0.523,11.765 ; -23.8,2.819 -5.258,2.819 -1.132,6.945 -1.132,8.926 -0.523,9.536 -0.523,11.765
  lines w0.15: -78.207,9.246 -86.309,9.246 -89.205,12.141 -89.205,26.848 -87.097,28.956 -80.543,28.956 -79.756,29.743 2.362,29.743 2.362,14.097 ; -58.903,11.252 -58.064,12.09 -48.666,12.09 -46.025,12.09 -45.237,12.878 -44.221,12.878 -43.637,13.462 ; -43.637,14.402 -43.637,13.462 ; -40.183,9.906 -33.401,9.906 -32.715,9.22 -32.715,3.073 -30.277,0.635 ; -31.547,10.236 -30.81,10.236 -30.81,9.398 -30.328,8.915 -30.328,3.048 -30.099,2.819 -23.8,2.819 ; -27.229,10.211 -26.365,9.347 -22.276,9.347 -21.971,9.652 -14.199,9.652 -11.582,9.652 -8.712,12.522 -5.766,12.522 -4.191,10.947 -4.191,9.957 -3.15,8.915 -1.118,8.915 -0.508,9.525 -0.508,11.786 -0.483,11.811 ; -4.089,0.635 -3.708,0.254 -3.708,-2.007 -3.632,-2.083 1.981,-2.083 2.362,-1.702 2.362,14.224 ; -1.981,15.265 -1.981,22.987 -3.835,24.841 -84.43,24.841 -86.97,22.301 -86.97,14.249 -85.039,12.319 -81.331,12.319 -79.781,13.868 -79.781,17.983 -79.146,18.618 -73.584,18.618 -70.51,15.545 -44.755,15.545 -43.637,14.427 -43.637,13.462

## Silkscreen, mask and mechanical layers (free items; w line width, h text height)
Top Overlay:
  text "AFE_Mezzanine_template v0.8" at -70.079,-1.041 h1.5
  text "WUT" at -28.296,-1.143 h1.5
Bottom Overlay:
  text "P12V" at -44.729,17.069 h1.1
  text "P3V3" at -66.65,16.967 h1.1
  text "N6V" at -62.027,16.967 h1.1
  text "P6V" at -57.074,16.942 h1.1
  text "N12V" at -51.46,16.942 h1.1
  text "AFE mezzanine template v0.8 WUT ISE" at -23.622,-0.864 h1.5
Mechanical 1:
  lines w0.05: -110,19.25 -110,16.75 -80.5,16.75 ; -97.5,30.75 -88.75,30.75 -88.25,30.25 -87,29 -80.5,29 -79.75,29.75 -69.5,29.75 2.5,29.75 2.5,-2.25 -79,-2.25 -80,-3.25 -80.5,-3.75 -87,-3.75 -88,-2.75 -88,-2.25 -88,-2 -88.75,-1.25 -97.5,-1.25 -97.5,30.75 ; -97.5,30.75 -96.5,30.75 -97.5,30.75
Mechanical 2:
  lines w0.05: -80,0 -77,0 ; -80,27 -77,27 6,27 ; -77,31 -77,0 ; -2.568,21.033 -2.3,21.033 ; -2.54,7.9 -1.6,7.9 ; -2.4,22.1 -1.6,22.1 ; -2.3,20.833 -2.3,21.033 ; -2.3,21.232 -2.3,21.033 ; -1.9,21.033 -2.3,21.033 ; -1.6,7.1 -1.6,7.9 ; -1.6,8.758 -1.6,7.9 ; -1.6,21.332 -1.6,22.1 ; -1.6,22.9 -1.6,22.1 ; -0.75,15 -0.25,15 ; 0,-5 0,27 0,30 ; 0.4,7.9 -1.6,7.9 ; 0.775,22.1 -1.6,22.1 ; 1.032,21.033 1.3,21.033 ; 1.3,20.833 1.3,21.033 ; 1.3,21.232 1.3,21.033 ; 1.7,21.033 1.3,21.033 ; 3,0 0,0 -77,0
  lines w0.127: -89.33,12.382 -88.329,12.382
  text "DAC2 N" at -24.689,26.035 h0.5
  text "M2.5 fi 2.7" at -74.5,26 h0.5
  text "ADC1 IN P" at -8.534,25.883 h0.5
  text "M2.5 fi 2.7" at 1.5,24.5 h0.5
  text "DAC2 P" at -24.689,21.742 h0.5
  text "1" at 1.8,20.933 h0.5
  text "LO N" at -14.681,19.812 h0.5
  text "ADC1 IN N" at -8.585,13.818 h0.5
  text "LO P" at -15.062,13.183 h0.5
  text "ADC2 IN P" at -8.577,13 h0.5
  text "ADC2 IN N" at -8.661,7.214 h0.5
  text "DAC1 N" at -24.536,7.036 h0.5
  text "M2.5 fi 2.7" at 2,2 h0.5
  text "DAC1 P" at -24.384,1.168 h0.5
  text "M2.5 fi 2.7" at -74.5,1 h0.5
Mechanical 8:
  lines w0.05: -78.5,0 -77,0 ; -78.5,27 -77,27 ; -77,-1 -77,0 ; -77,1 -77,0 ; -77,26 -77,27 ; -77,28 -77,27 ; -75.5,0 -77,0 ; -75.5,27 -77,27 ; -1.5,0 0,0 ; -1.5,27 0,27 ; -0.5,14.75 -0.5,15.25 ; 0,-1 0,0 ; 0,1 0,0 ; 0,26 0,27 ; 0,28 0,27 ; 1.5,0 0,0 ; 1.5,27 0,27

## Text inside footprints (layer, text, board x,y; h text height)
J8: Mechanical 8 "2.5mm" at -96.55,6.974 h1 r180; Mechanical 8 "3mm" at -101.6,6.949 h1 r180; Drill Drawing "r0.6" at -91.086,5.991 h1 r180; Drill Drawing "8.6" at -93.312,9.833 h1 r180; Drill Drawing "7.1" at -91.55,10.224 h1 r270
J11: Mechanical 8 "2.5mm" at -96.575,23.725 h1 r180; Mechanical 8 "3mm" at -101.625,23.7 h1 r180; Drill Drawing "r0.6" at -91.111,22.742 h1 r180; Drill Drawing "8.6" at -93.337,26.583 h1 r180; Drill Drawing "7.1" at -96.464,25.219 h1 r270
J16: Mechanical 8 "Techno" at -9.2,24 h0.6; Mechanical 8 "Pin-in-Paste" at -9.2,24.9 h0.6
J17: Mechanical 8 "3mm" at -95.748,17.781 h1; Mechanical 8 "2.5mm" at -91.7,17.781 h1
J18: Mechanical 8 "Techno" at -9.2,18 h0.6; Mechanical 8 "Pin-in-Paste" at -9.2,18.9 h0.6
J19: Mechanical 8 "Techno" at -9.2,11.5 h0.6; Mechanical 8 "Pin-in-Paste" at -9.2,12.4 h0.6
J20: Mechanical 8 "3mm" at -95.748,1.281 h1; Mechanical 8 "2.5mm" at -91.7,1.281 h1
J21: Mechanical 8 "Techno" at -9.2,5.5 h0.6; Mechanical 8 "Pin-in-Paste" at -9.2,6.4 h0.6
J22: Mechanical 8 "Techno" at -15.2,17.997 h0.6; Mechanical 8 "Pin-in-Paste" at -15.2,18.897 h0.6
J23: Mechanical 8 "Techno" at -15.2,11.5 h0.6; Mechanical 8 "Pin-in-Paste" at -15.2,12.4 h0.6
SW1: Bottom Overlay "ON" at -44.49,25.425 h1; Bottom Overlay "2" at -47.538,20.98 h1; Bottom Overlay "1" at -45.252,20.98 h1; Mechanical 14 "ON" at -44.49,25.425 h1; Mechanical 14 "2" at -47.538,20.98 h1; Mechanical 14 "1" at -45.252,20.98 h1
SW2: Bottom Overlay "1" at -51.983,20.833 h1; Bottom Overlay "2" at -54.269,20.833 h1; Bottom Overlay "ON" at -51.221,25.278 h1; Bottom Overlay "3" at -56.809,20.833 h1; Bottom Overlay "4" at -59.349,20.833 h1; Bottom Overlay "5" at -61.889,20.833 h1; Bottom Overlay "6" at -64.429,20.833 h1; Bottom Overlay "7" at -66.969,20.833 h1; Bottom Overlay "8" at -69.509,20.833 h1; Mechanical 14 "1" at -51.983,20.833 h1; Mechanical 14 "2" at -54.269,20.833 h1; Mechanical 14 "ON" at -51.221,25.278 h1; Mechanical 14 "3" at -56.809,20.833 h1; Mechanical 14 "4" at -59.349,20.833 h1; Mechanical 14 "5" at -61.889,20.833 h1; Mechanical 14 "6" at -64.429,20.833 h1; Mechanical 14 "7" at -66.969,20.833 h1; Mechanical 14 "8" at -69.509,20.833 h1